# Allegro board 08-19-master.brd
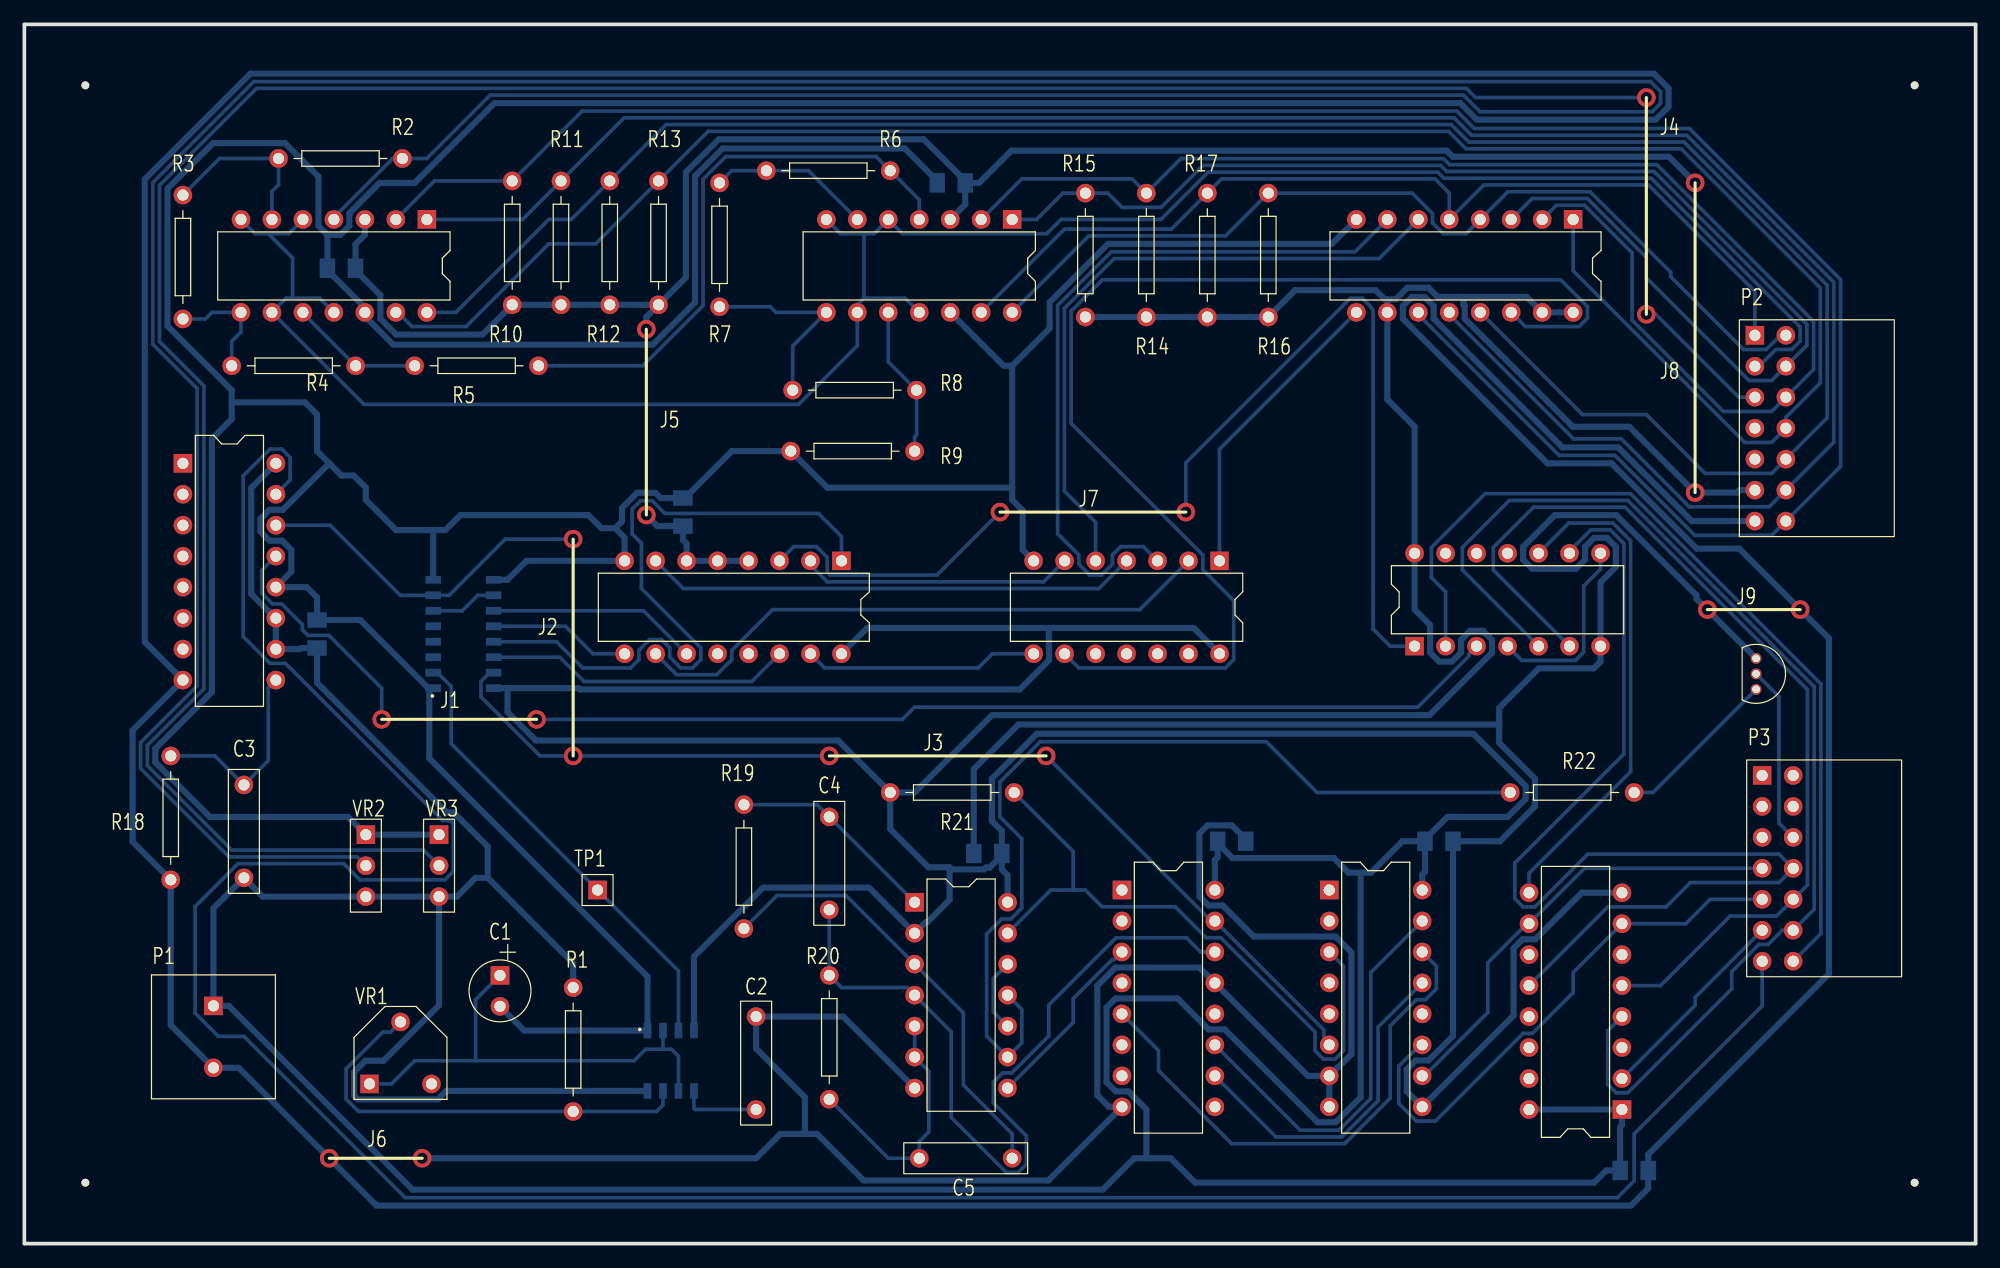
[diagram p0: board, top side]
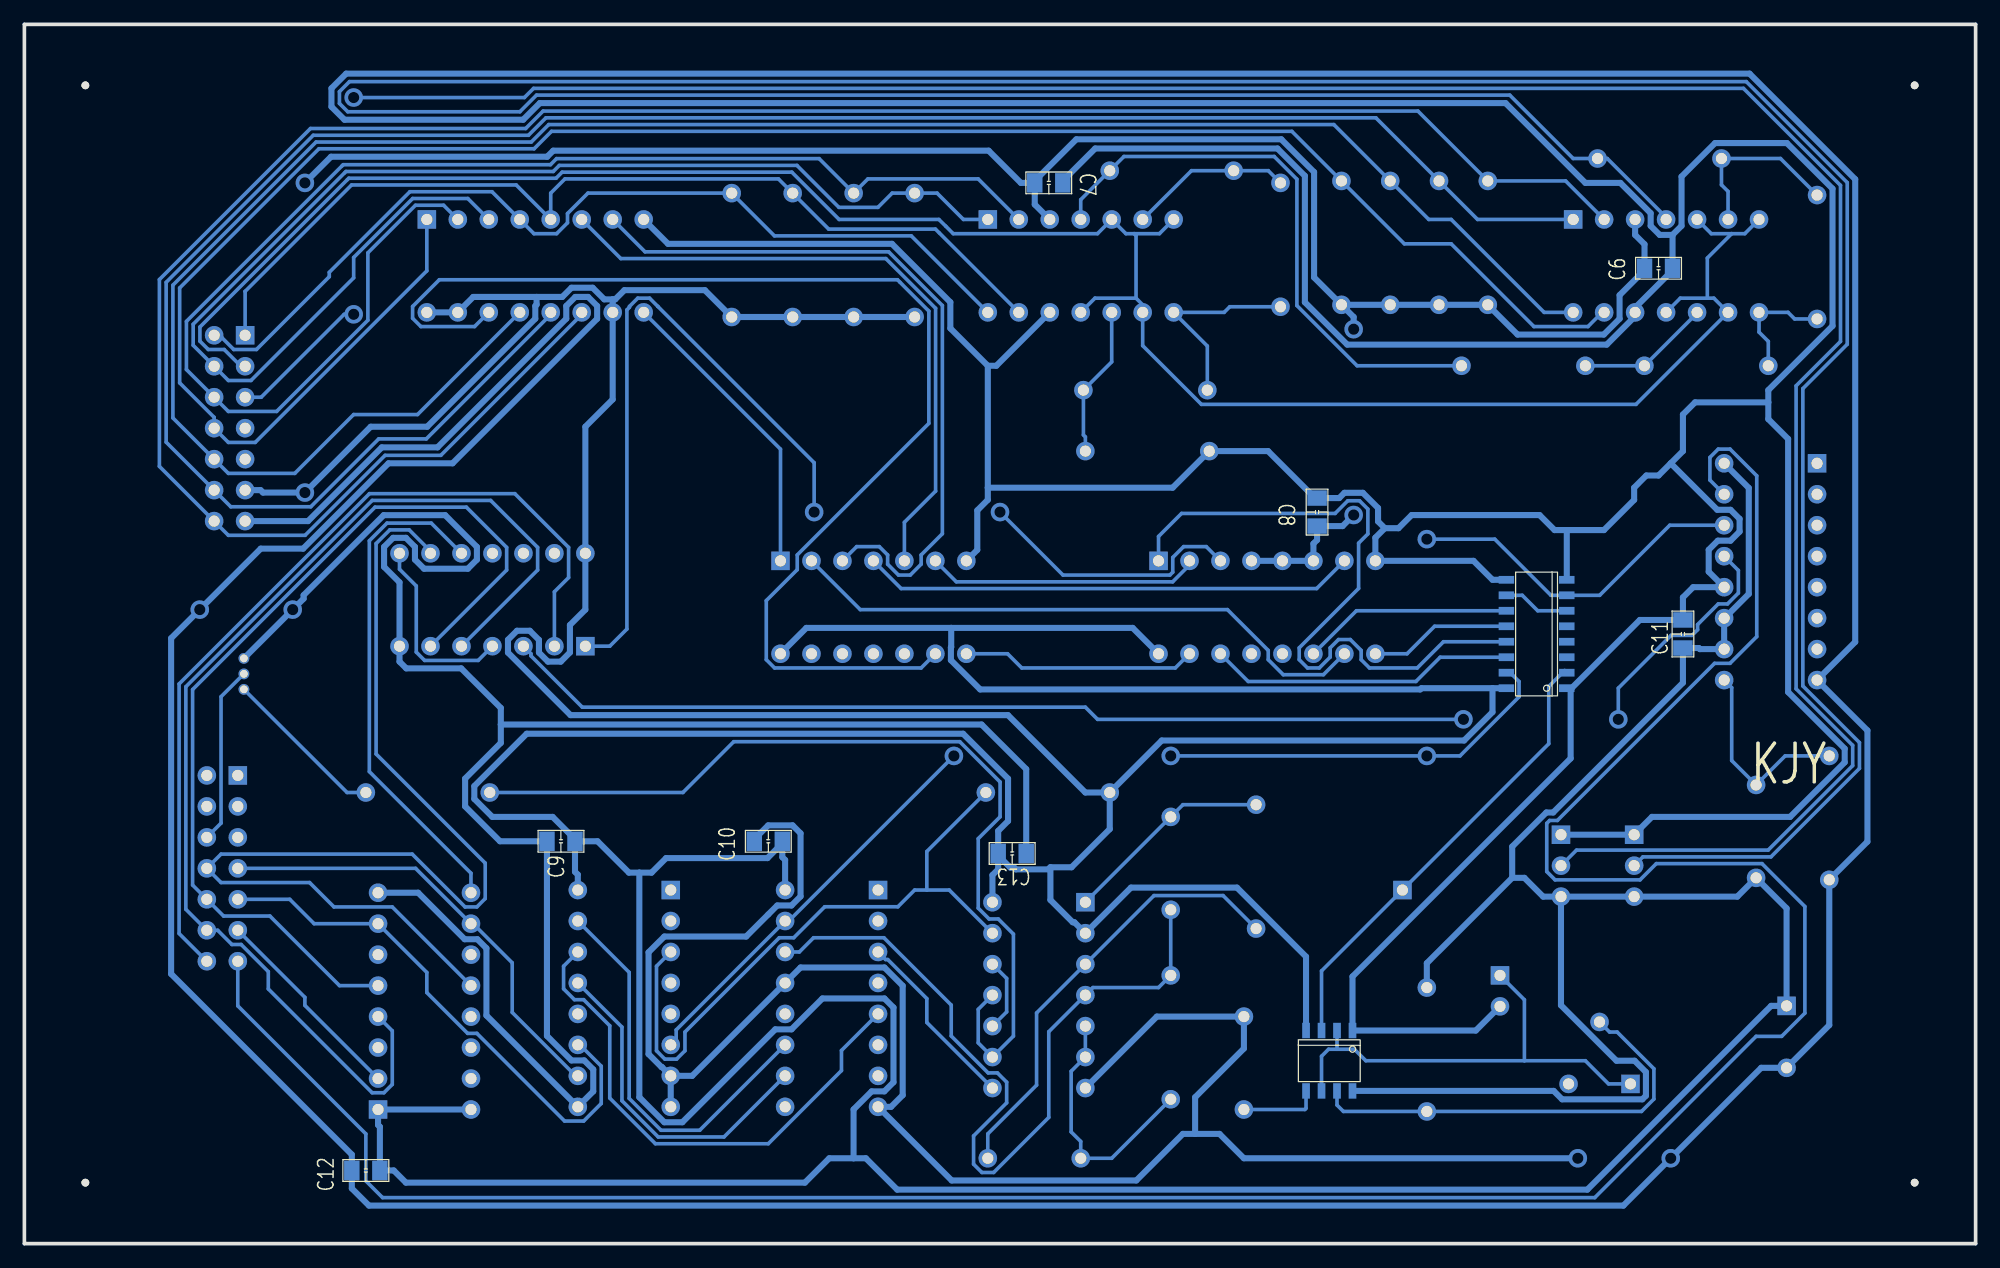
[diagram p1: board, bottom side, seen from below]

Outline 160 x 100 mm; copper layers: TOP, BOTTOM. Coordinates in mm from the lower left corner of the outline.
Outline path: 0,100 0,0 160,0 160,100 0,100

## Design rules (mm)
nets with their own width: min track width 0.5; nets +5V GND

## Placement (name value [footprint] x y rotation side)
C1  10uF  [CAP196]  39 22 180 top
C2  0.1uF  [CAP300]  60 11 90 top
C3  0.1uF  [CAP300]  18 30 90 top
C4  0.1uF  [CAP300]  66 35 270 top
C5  0.1uF  [CAP300]  81 7 180 top
C6  0.1uF  [SMDCAP]  27 80 180 bottom
C7  0.1uF  [SMDCAP]  77 87 180 bottom
C8  0.1uF  [SMDCAP]  54 59 90 bottom
C9  0.1uF  [SMDCAP]  115 33 0 bottom
C10  0.1uF  [SMDCAP]  98 33 0 bottom
C11  0.1uF  [SMDCAP]  24 49 90 bottom
C12  0.1uF  [SMDCAP]  131 6 0 bottom
C13  0.1uF  [SMDCAP]  80 32 180 bottom
J1  -  [44]  42 43 0 bottom
J2  -  [66]  45 40 270 bottom
J3  -  [66]  66 40 180 bottom
J4  -  [66]  133 94 90 bottom
J5  -  [55]  51 75 90 bottom
J6  -  [22]  32.62 7 0 bottom
J7  -  [55]  80 60 180 bottom
J8  -  [99]  137 87 90 bottom
J9  -  [22]  138 52 180 bottom
NOREF  -  []  0 0 90 top
NOREF#2  -  []  0 0 0 top
NOREF#3  -  [unnamed#2]  5 95 0 top
NOREF#4  -  [unnamed#2]  155 95 0 top
NOREF#5  -  [unnamed#2]  5 5 0 top
NOREF#6  -  [unnamed#2]  155 5 0 top
P1  CON2  [2P]  15.5 19.5 0 top
P2  CON14  [JUMPER14]  141.9 74.5 270 top
P3  CON14  [JUMPER14]  142.5 38.4 270 top
Q1  2SC1815  [TO92]  142 48 0 top
R1  10K  [RES400]  45 21 270 top
R2  10K  [RES400]  31 89 180 top
R3  10K  [RES400]  13 86 270 top
R4  10K  [RES400]  17 72 0 top
R5  10K  [RES400]  32 72 0 top
R6  10K  [RES400]  71 88 180 top
R7  10K  [RES400]  57 87 270 top
R8  10K  [RES400]  63 70 0 top
R9  100  [RES400]  73 65 180 top
R10  4.7K  [RES400]  40 77 90 top
R11  4.7K  [RES400]  44 77 90 top
R12  4.7K  [RES400]  48 77 90 top
R13  4.7K  [RES400]  52 77 90 top
R14  4.7K  [RES400]  92 76 90 top
R15  4.7K  [RES400]  87 76 90 top
R16  4.7K  [RES400]  102 76 90 top
R17  4.7K  [RES400]  97 76 90 top
R18  680K  [RES400]  12 40 270 top
R19  10K  [RES400]  59 36 270 top
R20  10K  [RES400]  66 22 270 top
R21  10K  [RES400]  71 37 0 top
R22  3.3K  [RES400]  132 37 180 top
TP1  TP  [JUMPER1]  47 29 0 top
U1  NE555  [SOIC8]  53 15 270 bottom
U2  LM339  [DIP14_3]  33 84 270 top
U3  LM339  [DIP14_3]  81 84 270 top
U4  40147  [DIP16_3]  127 84 270 top
U5  4069  [DIP14_3]  98 56 270 top
U6  4518  [SOIC16]  36 50 0 bottom
U7  4585  [DIP16_3]  67 56 270 top
U8  4027  [DIP16_3]  13 64 0 top
U9  4071  [DIP14_3]  114 49 90 top
U10  4001  [DIP14_3]  73 28 0 top
U11  4017  [DIP16_3]  90 29 0 top
U12  4051  [DIP16_3]  107 29 0 top
U13  4175  [DIP16_3]  131 11 180 top
VR1  1M  [VR1]  28.3 13.1 0 top
VR2  100K  [VR2]  28 31 0 top
VR3  10K  [VR2]  34 31 0 top

## Library data of the parts
C1 = Cap POL
C2-C5 = Cap NP
C6 = Cap TEXT_0
C7 = Cap TEXT_1
C8 = Cap TEXT_2
C9 = Cap TEXT_3
C10 = Cap TEXT_4
C11 = Cap TEXT_5
C12 = Cap TEXT_6
C13 = Cap TEXT_7
J1-J9 = JUMPER
P1 = CON2
P2 P3 = CON14
Q1 = 2SC1815_0
R1-R22 = resistor
TP1 = TP
U1 = NE555: Tolerance: ***; User Part Number: ***
U2 U3 = LM339: Tolerance: ***; User Part Number: ***
U4 = 40147: Tolerance: ***; User Part Number: ***
U5 = 4069: Tolerance: ***; User Part Number: ***
U6 = 4518: Tolerance: ***; User Part Number: ***
U7 = 4585: Tolerance: ***; User Part Number: ***
U8 = 4027: Tolerance: ***; User Part Number: ***
U9 = 4071: Tolerance: ***; User Part Number: ***
U10 = 4001: Tolerance: ***; User Part Number: ***
U11 = 4017: Tolerance: ***; User Part Number: ***
U12 = 4051: Tolerance: ***; User Part Number: ***
U13 = 4175: Tolerance: ***; User Part Number: ***
VR1 = VR1
VR2 VR3 = VR2

## Footprints (pads in the part's own frame, mm; a bottom-side part is the same pattern mirrored in y, then rotated)
2P
  rect 1.524x1.524 hole 0.914: 1(0,0)
  round 1.524 hole 0.914: 2(0,-5.08)
CAP196
  rect 1.524x1.524 hole 0.914: 1(0,0)
  round 1.524 hole 0.914: 2(0,2.54)
CAP300
  round 1.524 hole 0.914: 1(0,0) 2(7.62,0)
DIP14_3
  rect 1.524x1.524 hole 0.914: 1(0,0)
  round 1.524 hole 0.914: 2(0,-2.54) 3(0,-5.08) 4(0,-7.62) 5(0,-10.16) 6(0,-12.7) 7(0,-15.24) 8(7.62,-15.24) 9(7.62,-12.7) 10(7.62,-10.16) 11(7.62,-7.62) 12(7.62,-5.08) 13(7.62,-2.54) 14(7.62,0)
DIP16_3
  rect 1.524x1.524 hole 0.914: 1(0,0)
  round 1.524 hole 0.914: 2(0,-2.54) 3(0,-5.08) 4(0,-7.62) 5(0,-10.16) 6(0,-12.7) 7(0,-15.24) 8(0,-17.78) 9(7.62,-17.78) 10(7.62,-15.24) 11(7.62,-12.7) 12(7.62,-10.16) 13(7.62,-7.62) 14(7.62,-5.08) 15(7.62,-2.54) 16(7.62,0)
JUMPER1
  rect 1.524x1.524 hole 0.914: 1(0,0)
JUMPER14
  rect 1.524x1.524 hole 0.914: 1(0,0)
  round 1.524 hole 0.914: 2(0,2.54) 3(2.54,0) 4(2.54,2.54) 5(5.08,0) 6(5.08,2.54) 7(7.62,0) 8(7.62,2.54) 9(10.16,0) 10(10.16,2.54) 11(12.7,0) 12(12.7,2.54) 13(15.24,0) 14(15.24,2.54)
RES400
  round 1.524 hole 0.914: 1(0,0) 2(10.16,0)
SMDCAP
  rect 1.27x1.6 smd: 1(-0.15,0) 2(2.15,0)
SOIC8
  rect 1.27x0.635 smd: 1(-2.476,1.905) 2(-2.476,0.635) 3(-2.476,-0.635) 4(-2.476,-1.905) 5(2.476,-1.905) 6(2.476,-0.635) 7(2.476,0.635) 8(2.476,1.905)
SOIC16
  rect 1.27x0.635 smd: 1(-2.476,4.445) 2(-2.476,3.175) 3(-2.476,1.905) 4(-2.476,0.635) 5(-2.476,-0.635) 6(-2.476,-1.905) 7(-2.476,-3.175) 8(-2.476,-4.445) 9(2.476,-4.445) 10(2.476,-3.175) 11(2.476,-1.905) 12(2.476,-0.635) 13(2.476,0.635) 14(2.476,1.905) 15(2.476,3.175) 16(2.476,4.445)
TO92
  round 0.889 hole 0.635: 1(0,0) 2(0,-1.27) 3(0,-2.54)
unnamed#2
  round 0.635 hole 3.175 unplated: (0,0)
VR1
  rect 1.524x1.524 hole 0.914: 1(0,0)
  round 1.524 hole 0.914: 2(2.54,5.08) 3(5.08,0)
VR2
  round 1.524 hole 0.914: 1(0,-2.54) 2(0,0)
  rect 1.524x1.524 hole 0.914: 3(0,2.54)

## Nets
+5V: C3.1 C6.1 C7.1 C8.1 C9.1 C10.1 C11.1 C12.1 C13.1 P1.1 P2.11 R1.1 R10.1 R11.1 R12.1 R13.1 R14.1 R15.1 R16.1 R17.1 R21.1 U1.4(RST) U1.8(VCC) U2.3 U3.3 U4.10(I\9\) U4.15(I\0\) U4.16(VCC) U5.14 U6.16 U7.4(A>BIN) U7.5(A<BIN) U7.6(A=BIN) U7.16(VCC) U8.10(J) U8.11(K) U8.16 U9.14 U10.2(I1) U10.14 U11.16(VCC) U12.16(VCC) U13.1(R\S\T\) U13.16(VCC) VR2.1(A) VR3.1(A)
GND: C1.2 C2.2 C6.2 C7.2 C8.2 C9.2 C10.2 C11.2 C12.2 C13.2 P1.2 P2.13 Q1.1(B) R9.2 R18.2 U1.1(GND) U2.12 U3.12 U4.8(GND) U5.7 U6.1(CLK) U6.8 U6.9(CLK) U7.8(GND) U8.8 U8.12(RST) U9.7 U10.7 U11.8(GND) U11.13(C\K\E\N\) U12.7(VEE) U12.8(GND) U12.9(C) U13.8(GND) VR2.3(WIPER) VR3.3(WIPER)
ADC0: P2.14 R10.2 U2.2(OUT) U4.11(I\1\)
ADC1: P2.12 R11.2 U2.1(OUT) U4.12(I\2\)
ADC2: P2.10 R12.2 U2.14(OUT) U4.13(I\3\)
ADC3: P2.8 R13.2 U2.13(OUT) U4.1(I\4\)
ADC4: P2.6 R14.2 U3.2(OUT) U4.2(I\5\)
ADC5: P2.4 R15.2 U3.1(OUT) U4.3(I\6\)
ADC6: P2.2 R16.2 U3.14(OUT) U4.4(I\7\)
ADC7: P2.1 R17.2 U3.13(OUT) U4.5(I\8\)
CLK: TP1.1 U1.3(OUT) U6.2(EN)
MOTOR-GND: P3.6 Q1.2(C)
MR: U6.7(CLR) U6.15(CLR) U8.14(Q\) U11.15(RST) U12.6(E\N\)
MR2: P3.13 U8.15(Q)
SW1: P3.14 U9.2(I1)
SW2: P3.12 U9.5(I0) U13.4(D0)
SW3: P3.10 U9.6(I1) U13.5(D1)
SW4: P3.8 U9.9(I1) U13.12(D2)
SWLED1: P3.11 U13.2(Q0)
SWLED2: P3.9 U12.11(A) U13.7(Q1)
SWLED3: P3.7 U12.10(B) U13.10(Q2)
VR3: P2.5 VR3.2(B)
VR-LED: P2.3 U2.5(+IN) U2.7(+IN) U2.9(+IN) U2.11(+IN) U3.5(+IN) U3.7(+IN) U3.9(+IN) U3.11(+IN)
N01738: R2.2 R3.1 U2.6(-IN)
N01745: R2.1 U2.4(-IN) VR2.2(B)
N01788: R3.2 R4.1 U2.8(-IN)
N01863: R4.2 R5.1 U2.10(-IN)
N01938: R5.2 R6.1 U3.4(-IN)
N02013: R6.2 R7.1 U3.6(-IN)
N02099: R7.2 R8.1 U3.8(-IN)
N02959: R8.2 R9.1 U3.10(-IN)
N05183: U4.9(A\) U5.1(I)
N05210: U4.7(B\) U5.3(I)
N05222: U4.6(C\) U5.5(I)
N05234: U4.14(D\) U5.9(I)
N05246: U5.2(O) U7.10(A0)
N05283: U5.4(O) U7.7(A1)
N05295: U5.6(O) U7.2(A2)
N05307: U5.8(O) U7.15(A3)
N05494: U7.3(A=BOUT) U9.1(I0)
N05551: U6.11(Q0) U7.11(B0)
N05553: U6.12(Q1) U7.9(B1)
N05555: U6.13(Q2) U7.1(B2)
N05557: U6.14(Q3) U7.14(B3)
N06357: R1.2 U1.7(DISC) VR1.2
N06361: C1.1 U1.2(TRIG) U1.6(THR) VR1.1
N07130: U8.13(CLK) U9.3(O)
N07335: C3.2 R18.1 U8.9(SET)
N07588: C2.1 U1.5(CV)
N08311: U6.6(Q3) U6.10(EN)
N11638: C4.1 R19.1 U10.1(I0)
N11666: C4.2 R20.1 U10.4(O) U11.14(CLK)
N11691: C5.2 R20.2 U10.5(I0) U10.6(I1)
N11734: C5.1 R19.2 U10.3(O)
N11895: U11.11(9) U12.15(X2)
N11956: U11.5(6) U12.14(X1)
N11968: U11.10(4) U12.13(X0)
N11980: U10.8(I0) U11.3(0)
N12001: R21.2 U10.13(I1) U12.3(X)
N12045: U10.10(O) U10.12(I0)
N12067: R22.2 U10.9(I1) U10.11(O)
N12155: Q1.3(E) R22.1
N14271: U9.10(O) U13.9(CLK)
N14317: U9.4(O) U9.8(I0)

Pads without a net: P2 7 9; P3 1 2 3 4 5; U5 10 11 12 13; U6 3 4 5; U7 12 13; U8 1 2 3 4 5 6 7; U9 11 12 13; U11 1 2 4 6 7 9 12; U12 1 2 4 5 12; U13 3 6 11 13 14 15; VR1 3

## Via types
v1: diameter 1.524, hole 0.914, TOP to BOTTOM, 18 vias

## Routing (per net, layer and track width the routed paths; a pad name or vN(x,y) marks a point on that pad's centre or on a via; arc(x,y) is an arc through that point)
+5V: length 910.2
  BOTTOM w0.5: U1.4 54.91,23.54 60.57,29.2 69.26,29.2 U10.2 73.9,26.36 74.03,26.36 75.87,28.19 75.87,30.87 ; R21.1 66.73,41.27 41.94,41.27 39.62,43.59 39.62,45.55 ; R21.1 71,34 74.13,30.87 75.87,30.87 ; R21.1 73,37 79.35,43.35 115.22,43.35 120.35,48.48 120.35,49.52 119.61,50.27 118.56,50.27 117.81,49.52 117.81,48.48 117.06,47.73 116.02,47.73 115.27,48.48 115.27,50.73 114,52 U9.14 114,67 111.76,69.24 U4.10 111.76,77.45 ; C7.1 77.15,85.23 U3.3 ; C7.1 78.29,87 80.93,89.64 116.64,89.64 117.13,89.14 134.86,89.14 v1(137,87) ; C7.1 77.15,87.17 73.74,90.57 56.93,90.57 54.24,87.89 54.24,79.25 R13.1 ; P2.11 140.63,61.8 140.43,61.6 v1(137,61.6) 131.6,67 126.97,67 118.11,75.86 118.11,76.91 118,77.01 118,77.65 ; v1(51,59.76) 51.91,58.85 C8.1 54,57.71 54.3,57.41 U7.6 U7.5 U7.4 ; 39.62,45.55 U6.16 ; 39.62,45.55 45.45,45.55 45.55,45.45 81.62,45.45 84.03,47.85 84.03,48.91 84,48.93 84,50.5 ; R15.1 R14.1 R17.1 R16.1 104.2,78.2 110.8,78.2 111.55,77.45 111.76,77.45 ; 38,30 45,23 R1.1 ; 38,30 37,30 35.46,28.46 VR3.1 ; 38,30 38,32.56 35.2,35.36 34.64,35.36 24,46 C11.1 22.7,48.85 22.61,48.76 U8.10 U8.11 20.57,51.35 20.54,51.35 18.6,53.29 18.6,61.98 U8.16 ; 80.15,31.84 80.15,30.7 80.62,30.23 U10.14 ; 80.15,31.84 79.16,30.84 78.84,30.84 78.69,30.7 76.04,30.7 75.87,30.87 ; 80.15,31.84 C13.1 80.15,33.85 79.34,34.66 79.34,38.13 83.03,41.82 118.81,41.82 123.11,37.52 123.11,36.48 121.63,35 116.69,35 114.85,33.16 C9.1 ; C9.1 114.85,30.5 114.62,30.27 U12.16 ; C9.1 113,33 110.43,30.43 109.57,30.43 ; VR3.1 34,19.55 29.45,15 27.96,15 27.03,14.07 27.03,12.13 27.33,11.83 33.91,11.83 34.59,12.52 U1.8 ; VR3.1 VR2.1 19.54,28.46 C3.1 15.5,27.5 P1.1 16.77,19.5 31.84,4.43 88.43,4.43 91,7 92.01,7 ; 109.57,30.43 108.57,30.43 107.38,31.62 99.06,31.62 97.85,32.84 ; 109.57,30.43 109.57,12 107.53,9.95 106.05,9.95 98.42,17.57 97.09,17.57 94.56,20.11 89.47,20.11 88.73,19.36 88.73,13.23 89.48,12.49 90.53,12.49 92.01,11.01 92.01,7 ; 84,50.5 69.12,50.5 U7.16 ; 84,50.5 95.88,50.5 U5.14 ; 118,77.65 115.89,77.65 115.14,78.4 113.4,78.4 112.45,77.45 111.76,77.45 ; 118,77.65 123.19,77.65 U4.15 U4.16 ; R13.1 51,76 v1(51,75) ; R13.1 R12.1 R11.1 R10.1 37.56,74.56 30.49,74.56 29.19,75.86 29.19,77.79 27.15,79.83 C6.1 27.15,81.96 27.92,82.73 U2.3 ; 97.85,32.84 97.85,31.7 97.62,31.47 U11.16 ; 97.85,32.84 C10.1 ; U13.16 U13.1 131,9.73 130.85,9.58 C12.1 129.71,6 128.71,5 96,5 94,7 92.01,7
GND: length 1322.8
  BOTTOM w0.5: C7.2 74.85,87.17 72.19,89.82 57.25,89.82 55,87.57 55,77.21 51.52,73.73 30.25,73.73 27.92,76.06 U2.12 27.92,76.77 24.85,79.83 C6.2 24.85,82.73 24.86,82.73 ; U13.8 127.71,28.78 123.9,24.97 122.86,24.97 122.11,24.23 122.11,18.71 U12.9 113.35,12.49 113.35,14.29 114.09,15.03 115.14,15.03 117.15,17.04 C9.2 121,33 123.86,35.86 123.86,38.14 120.93,41.07 120.93,42.57 ; U6.1 33.21,45.55 ; 33.21,45.55 33.21,39.79 51.09,21.91 U1.1 40.98,17.48 C1.2 ; 33.21,45.55 33.13,45.55 27.53,51.15 C11.2 24,53 23.16,53.84 U8.12 21.89,55.11 21.89,56.91 21.14,57.65 20.09,57.65 19.35,58.4 19.35,59.45 20.09,60.19 21.18,60.19 25,64 ; U12.7 107.72,14.48 107.75,14.48 108.82,15.55 108.82,23.89 107.53,25.19 100.81,25.19 99,27 98.27,27.73 97.09,27.73 96.35,28.48 96.35,33.65 97.01,34.3 99.01,34.3 100.15,33.16 C10.2 ; U12.7 105.24,13.76 U11.13 96.35,22.65 89.47,22.65 87.98,21.15 87.98,12.17 88.93,11.22 U11.8 83.96,5.18 68.82,5.18 65,9 64,9 ; U12.7 U12.8 ; U5.7 81.86,56.9 81.86,60.14 81,61 81,62 ; 120.93,42.57 120.93,43.93 124.18,47.18 128.69,47.18 129.24,47.73 U9.7 129.24,54.24 130.51,55.51 130.51,57.15 129.76,57.89 128.72,57.89 127.97,57.15 127.97,56.1 127.22,55.35 123.64,55.35 122.89,56.09 122.89,57.15 125.5,59.75 130.54,59.75 137.1,53.18 137.1,52.9 v1(138,52) Q1.1 ; 120.93,42.57 81.51,42.57 77.85,38.92 C13.2 ; 24.86,82.73 24.11,83.47 24.11,87.52 21.36,90.27 15.47,90.27 11.73,86.53 11.73,75.27 17,70 17,69 ; 24.86,82.73 25.91,82.73 26.65,83.47 26.65,84.52 29.13,87 32,87 38.54,93.54 117.73,93.54 119.1,92.18 133.75,92.18 134.82,93.25 134.82,94.75 133.61,95.96 18.54,95.96 9.87,87.3 9.87,49.35 U8.8 8.87,42.09 8.87,32.97 R18.2 12,17.92 P1.2 17.58,14.42 v1(25,7) 28.88,3.12 131.74,3.12 133.15,4.53 C12.2 133.15,7.3 147.97,22.12 147.97,49.65 v1(145.62,52) 140.62,57 137.14,57 130.14,64 124.89,64 113.03,75.86 113.03,76.91 113.78,77.65 114.83,77.65 115.57,76.91 115.57,75.86 126.12,65.31 130.69,65.31 136.74,59.26 P2.13 ; U3.12 80.3,72 81,72 ; 25,64 24,65 24,68 23,69 17,69 ; 25,64 26,63 27,63 28,62 28,61 30.48,58.52 33.52,58.52 ; 48.44,58.68 49.22,57.9 U7.8 41.17,56 39.62,54.45 U6.9 ; 48.44,58.68 49,59.23 49,60.33 50.25,61.58 51.76,61.58 52.19,61.15 C8.2 54.16,61.15 58.02,65 R9.2 65.84,62 81,62 ; 48.44,58.68 47.32,58.68 46.25,59.75 35.75,59.75 34.52,58.52 33.52,58.52 ; 33.52,58.52 U6.8 ; 17,69 17,67.63 15.37,66 15.37,45.23 10.73,40.59 10.73,39.48 15.21,35 26.54,35 VR2.3 VR3.3 ; U4.8 107.22,82 88.86,82 84.07,77.21 84.07,75.07 81,72 ; 81,62 81,72 ; 64,9 62,9 60,7 v1(32.62,7) ; 64,9 64,12 60,16 C2.2 67.14,18.62 U10.7
ADC0: length 187.8
  BOTTOM w0.3: U2.2 33.62,87.16 R10.2 45.73,92.89 117.46,92.89 118.89,91.46 136.54,91.46 148.93,79.07 148.93,63.75 P2.14 143.27,58.09 136.98,58.09 130.42,64.65 125.85,64.65 114.3,76.2 U4.11
ADC1: length 178
  BOTTOM w0.3: U2.1 40.84,84 R11.2 49.18,92.34 117.23,92.34 118.66,90.91 136.31,90.91 148.38,78.84 148.38,65.74 P2.12 143.07,60.43 136.52,60.43 130.95,66 127.04,66 116.84,76.2 U4.12
ADC2: length 173.3
  BOTTOM w0.3: U2.14 35.38,76.38 43,84 44.84,84 R12.2 52.62,91.78 117,91.78 118.43,90.35 136.08,90.35 147.82,78.61 147.82,67.72 P2.10 143.27,63.17 137.83,63.17 133,68 127.76,68 U4.13
ADC3: length 169.9
  BOTTOM w0.3: U2.13 30.62,76.38 31.79,75.21 36.21,75.21 43,82 46.84,82 R13.2 56.07,91.23 116.77,91.23 118.2,89.8 135.85,89.8 147.27,78.38 147.27,70.6 144.44,67.77 P2.8 143.27,65.71 141.07,65.71 127,79.79 U4.1
ADC4: length 115.2
  BOTTOM w0.3: U4.2 125.63,85.17 127.93,85.17 131.83,81.26 131.83,75.74 139.32,68.25 143.27,68.25 P2.6 146.71,71.69 146.71,75.64 133.97,88.38 133.86,88.49 116.86,88.49 116.36,88.99 94.83,88.99 R14.2 90.83,87.33 81.79,87.33 U3.2
ADC5: length 108.4
  BOTTOM w0.3: U3.1 83,84 85.16,86.16 R15.2 88.84,86.16 90.01,84.99 93.21,84.99 96.65,88.43 116.13,88.43 116.63,87.94 133.63,87.94 133.75,87.82 146.16,75.41 146.16,73.68 P2.4 143.27,70.79 141.42,70.79 133,79.21 133,80.88 128.16,85.72 123.64,85.72 U4.3
ADC6: length 76.8
  BOTTOM w0.3: U3.14 87.27,82.65 98.49,82.65 R16.2 113.79,86.16 115.47,84.48 115.47,83.72 116.36,82.83 118.21,82.83 U4.4 121.65,86.27 128.39,86.27 135,79.66 135,79.3 140.97,73.33 142.83,73.33 143.78,74.29 144.23,74.29 P2.2
ADC7: length 79
  BOTTOM w0.3: P2.1 141.9,78.1 141.9,78.1 133.17,86.83 119.67,86.83 U4.5 116.84,86.16 115.67,87.33 98.17,87.33 R17.2 94.05,83.21 85.3,83.21 84.97,82.89 U3.13
CLK: length 38
  BOTTOM w0.3: U1.3 53.63,22.36 TP1.1 35,41 35,45.7 33.7,47 U6.2
MOTOR-GND: length 14.7
  BOTTOM w0.3: Q1.2 143.87,44.86 143.87,34.49 P3.6
MR: length 95.3
  BOTTOM w0.3: U8.14 25.08,58.92 30.82,53.17 U6.7 34.83,53.17 39.43,57.78 v1(45,57.78) ; v1(83.78,40) 97.32,26.46 U11.15 106.55,17.53 106.55,16.75 U12.6 ; U6.15 38.16,46.83 37.44,46.1 37.44,44.85 42.28,40 v1(45,40) v1(66,40)
MR2: length 228.6
  BOTTOM w0.3: U8.15 21.79,62.62 21.79,64.48 21.1,65.17 20.14,65.17 17.95,62.98 17.95,49.78 20.14,47.59 21.41,47.59 34.29,34.71 34.93,34.71 35.17,34.47 35.17,30.52 34.48,29.83 27.52,29.83 26.18,31.17 17.52,31.17 14,27.65 14,18.9 15.9,17 18,17 31.23,3.77 130.63,3.77 132,5.14 132,9 142.5,19.5 P3.13
SW1: length 72.5
  BOTTOM w0.3: U9.2 116.54,53.46 115.37,54.63 115.37,57.1 119.78,61.51 131.71,61.51 147.31,45.9 147.31,25.43 P3.14
SW2: length 96
  BOTTOM w0.3: U9.5 117.91,55.25 117.91,57.1 121.77,60.96 131.48,60.96 146.76,45.67 146.76,27.42 P3.12 144.15,25.7 142.98,24.53 142.22,24.53 140,22.31 140,20.89 131.48,12.37 130.52,12.37 129.83,13.06 129.83,17.45 U13.4
SW3: length 78.7
  BOTTOM w0.3: U13.5 134.16,21.16 139.87,26.87 143.67,26.87 P3.10 146.21,29.41 146.21,45.44 131.25,60.4 123.75,60.4 120.45,57.1 120.45,55.25 U9.6
SW4: length 89.7
  BOTTOM w0.3: U9.9 126.7,56.8 128.44,58.54 130.04,58.54 131.16,57.42 131.16,40.16 122.21,31.21 122.21,28.3 122.9,27.61 123.86,27.61 128.2,31.95 143.87,31.95 P3.8 143.87,29.61 136.61,29.61 134.61,27.61 129.83,27.61 U13.12
SWLED1: length 16.9
  BOTTOM w0.3: P3.11 137,20.2 137,19.54 U13.2
SWLED2: length 44.6
  BOTTOM w0.3: P3.9 138.24,28.24 136.24,26.24 U13.7 127,22.24 127,20.59 123.66,17.25 122.9,17.25 115.7,10.05 114.14,10.05 112.7,11.49 112.7,14.56 114.44,16.3 U12.11
SWLED3: length 37.3
  BOTTOM w0.3: U12.10 114.8,13.76 120,18.96 120,23.04 123.2,26.24 U13.10 127.92,30.78 P3.7
VR3: length 215.6
  BOTTOM w0.3: v1(133,94) 119,94 118.25,94.75 19.04,94.75 11.08,86.8 11.08,74 14.72,70.36 14.72,45.51 10.08,40.87 10.08,39.2 17.01,32.27 32.73,32.27 VR3.2 ; v1(133,76.22) 133.78,76.22 140.58,69.42 P2.5
VR-LED: length 180.2
  BOTTOM w0.3: U3.7 66.93,82.83 69,82.83 ; P2.3 142.24,71.96 143.61,73.33 144.92,73.33 145.61,74.02 145.61,75.18 133.51,87.27 133.4,87.38 116.4,87.38 115.9,87.88 97.07,87.88 93.19,84 85.01,84 84.45,83.45 83.83,82.83 72.01,82.83 U3.5 69.67,82.83 69,82.83 ; 20,82.83 18.93,82.83 U2.7 ; 20,82.83 21.67,82.83 U2.5 ; 20,82.83 22,80.83 22,77.55 ; 69,82.83 68.85,82.68 68.85,77.55 ; 22,77.55 24.21,77.55 U2.11 ; 22,77.55 21.47,77.55 U2.9 27.85,68.83 63.48,68.83 68.3,73.65 U3.9 68.3,77 68.85,77.55 ; 68.85,77.55 72.21,77.55 U3.11
N01738: length 14.3
  BOTTOM w0.3: R3.1 16,89 R2.2 20.84,86.84 20.3,86.3 U2.6
N01745: length 315.6
  BOTTOM w0.3: U2.4 25.38,84.18 30.2,89 R2.1 33,89 38.2,94.2 118.01,94.2 119.37,92.83 133.48,92.83 134.17,93.52 134.17,94.48 133.34,95.31 18.81,95.31 10.53,87.03 10.53,73.77 14.17,70.12 14.17,45.74 9.53,41.1 9.53,38.97 16.78,31.72 27.28,31.72 VR2.2
N01788: length 9.7
  BOTTOM w0.3: R4.1 17,74 17.76,74.76 U2.8 15.38,76.38 14.84,75.84 R3.2
N01863: length 11
  BOTTOM w0.3: R5.1 R4.2 22.84,76.32 U2.10
N01938: length 47.5
  BOTTOM w0.3: R5.2 50.72,72 55.65,76.94 55.65,87.3 57.52,89.17 69.83,89.17 R6.1 73.38,85.62 U3.4
N02013: length 13.4
  BOTTOM w0.3: R7.1 58,88 R6.2 64.3,88 U3.6
N02099: length 16.5
  BOTTOM w0.3: R7.2 61.16,76.84 61.62,76.38 U3.8 63,73.62 R8.1
N02959: length 12.4
  BOTTOM w0.3: R9.1 73,66.17 73.16,66.33 R8.2 70.84,72.32 U3.10
N05183: length 25
  BOTTOM w0.3: U5.1 98,65.16 U4.9
N05210: length 60.6
  BOTTOM w0.3: U5.3 91.75,57.17 89.9,57.17 89.21,56.48 89.21,55.73 88.32,54.83 87.36,54.83 86.47,55.73 86.47,56.48 84.73,58.22 84.73,76.94 89.13,81.35 109.11,81.35 U4.7
N05222: length 53.8
  BOTTOM w0.3: U5.5 87.84,59.16 85.28,61.72 85.28,76.71 89.36,80.79 111.09,80.79 U4.6
N05234: length 101
  BOTTOM w0.3: U5.9 86.47,47.21 98.48,47.21 99.17,47.9 99.17,52.74 96.63,55.28 96.63,56.48 85.83,67.28 85.83,76.48 88.2,78.85 88.41,79.05 125.97,79.05 128.17,76.86 128.17,75.9 127.48,75.21 123.09,75.21 U4.14
N05246: length 48.7
  BOTTOM w0.3: U5.2 91.46,52 61.35,52 58.01,48.66 58.01,47.9 56.77,46.66 53.48,46.66 U7.10
N05283: length 40.5
  BOTTOM w0.3: U5.4 88.11,53.73 54.03,53.73 U7.7
N05295: length 22.5
  BOTTOM w0.3: U7.2 64.46,55.66 65.84,54.28 83.58,54.28 U5.6
N05307: length 19.3
  BOTTOM w0.3: U7.15 65.63,47.21 78.21,47.21 79.38,48.38 U5.8
N05494: length 78
  BOTTOM w0.3: v1(95.24,60) 95.24,64.05 108.05,76.86 108.74,77.55 109.7,77.55 110.39,76.86 110.39,76.79 110.59,76.58 110.59,50.41 112,49 U9.1 ; U7.3 63.09,57.17 64.94,57.17 65.83,56.27 65.83,55.07 66.07,54.83 74.83,54.83 v1(80,60)
N05551: length 17.3
  BOTTOM w0.3: U6.11 50.77,51.91 U7.11
N05553: length 11.7
  BOTTOM w0.3: U7.9 46.62,48.38 44.37,50.63 U6.12
N05555: length 56.3
  BOTTOM w0.3: U7.1 67,58 65.11,59.89 52.52,59.89 51.48,60.93 50.52,60.93 49.83,60.24 49.83,58.21 50.59,57.45 50.59,53.73 55.47,48.86 55.47,47.9 54.78,47.21 53.82,47.21 52.93,48.1 52.93,48.86 52.24,49.55 51.28,49.55 50.39,48.66 50.39,47.9 49.7,47.21 45.79,47.21 43.63,49.37 U6.13
N05557: length 25.2
  BOTTOM w0.3: U7.14 59.65,46.11 45.89,46.11 43.91,48.09 U6.14
N06357: length 36.3
  BOTTOM w0.3: VR1.2 30.02,17.36 29.39,17.36 26.38,14.34 26.38,11.86 27.4,10.84 R1.2 51.84,10.84 52.37,11.37 U1.7
N06361: length 39
  BOTTOM w0.3: 37,15 37,20 C1.1 ; 37,15 50,15 50.94,15.94 52.37,15.94 ; 37,15 32,15 30.1,13.1 VR1.1 ; 52.37,15.94 U1.2 ; 52.37,15.94 53.06,15.94 53.63,15.37 U1.6
N07130: length 99.1
  BOTTOM w0.3: U9.3 118.46,48.38 118.46,48.2 114.26,44 73,44 72,43 v1(42,43) ; U8.13 19.45,55.21 19.45,53.36 20.34,52.47 21.1,52.47 22.8,50.77 22.8,50.35 23.25,49.89 24.97,49.89 29.3,45.56 v1(29.3,43)
N07335: length 16.7
  BOTTOM w0.3: R18.1 15.62,40 C3.2 20,39.62 20,45.6 U8.9
N07588: length 6.6
  BOTTOM w0.3: C2.1 55,11 54.91,11.1 U1.5
N08311: length 5.5
  BOTTOM w0.3: U6.6 35.91,51.91 37.17,53.17 U6.10
N11638: length 17.3
  BOTTOM w0.3: U10.1 C4.1 65,36 R19.1
N11666: length 65.5
  BOTTOM w0.3: U11.14 96.45,23.92 95.29,25.09 89.52,25.09 84,19.57 84,17.03 80.97,14 80.21,14 79.45,13.24 79.45,11.55 82.17,8.84 82.17,6.52 81.48,5.83 80.52,5.83 76,10.35 76,17.38 U10.4 72.38,21 67,21 R20.1 C4.2
N11691: length 21
  BOTTOM w0.3: R20.2 70.84,7 C5.2 73.38,8.38 74.17,9.17 74.17,14.13 U10.6 U10.5
N11734: length 36.7
  BOTTOM w0.3: R19.2 61.71,28.55 67.37,28.55 U10.3 77,18.92 77,13 81,9 C5.1
N11895: length 33.1
  BOTTOM w0.3: U12.15 110.41,22.25 110.41,11.91 107.8,9.3 104.62,9.3 U11.11
N11956: length 43.4
  BOTTOM w0.3: U12.14 115.79,22.75 115.79,20.9 114.89,20.01 114.14,20.01 112,17.87 112,11.94 108.26,8.19 99,8.19 93,14.19 93,15.84 U11.5
N11968: length 27.8
  BOTTOM w0.3: U11.10 102.63,8.75 108.03,8.75 111,11.72 111,17.76 U12.13
N11980: length 15.1
  BOTTOM w0.3: U11.3 89.38,23.3 89.2,23.3 86,20.1 86,18.14 U10.8
N12001: length 54.5
  BOTTOM w0.3: 86,29 86,32.16 R21.2 ; 86,29 87,29 88.37,27.63 94.37,27.63 96.91,25.09 98.1,25.09 105.83,17.36 105.83,15.82 106.52,15.13 107.48,15.13 108.17,15.82 108.17,22.75 U12.3 ; 86,29 84.16,29 U10.13
N12045: length 6
  BOTTOM w0.3: U10.10 79.45,19.01 79.45,21.75 U10.12
N12067: length 76.6
  BOTTOM w0.3: R22.2 106,37 101.83,41.17 83.3,41.17 79.99,37.86 79.99,35.01 81.79,33.21 81.79,27.52 80.89,26.63 80.14,26.63 78.9,25.39 78.9,17.02 U10.9 81.79,16.47 81.79,19.21 U10.11
N12155: length 13.5
  BOTTOM w0.3: Q1.3 133.54,37 R22.1
N14271: length 41.5
  BOTTOM w0.3: U9.10 126.63,59.09 130.27,59.09 131.71,57.65 131.71,38.71 123.38,30.38 U13.9
N14317: length 15.7
  BOTTOM w0.3: U9.4 122.79,47.83 127.18,47.83 127.87,48.52 127.87,53.94 129.24,55.31 U9.8

## Text on the board
Ref Des/Silkscreen Bottom: KJY
DIMENSION: FIGURE | SIZE | 0.635 | 0.914 | 3.175 | DRILL CHART: TOP to BOTTOM | ALL UNITS ARE IN MILLIMETERS | PLATED | NON-PLATED | QTY | 3 | 294 | 4
